# EAGLE board button (EAGLE 6.5.0)
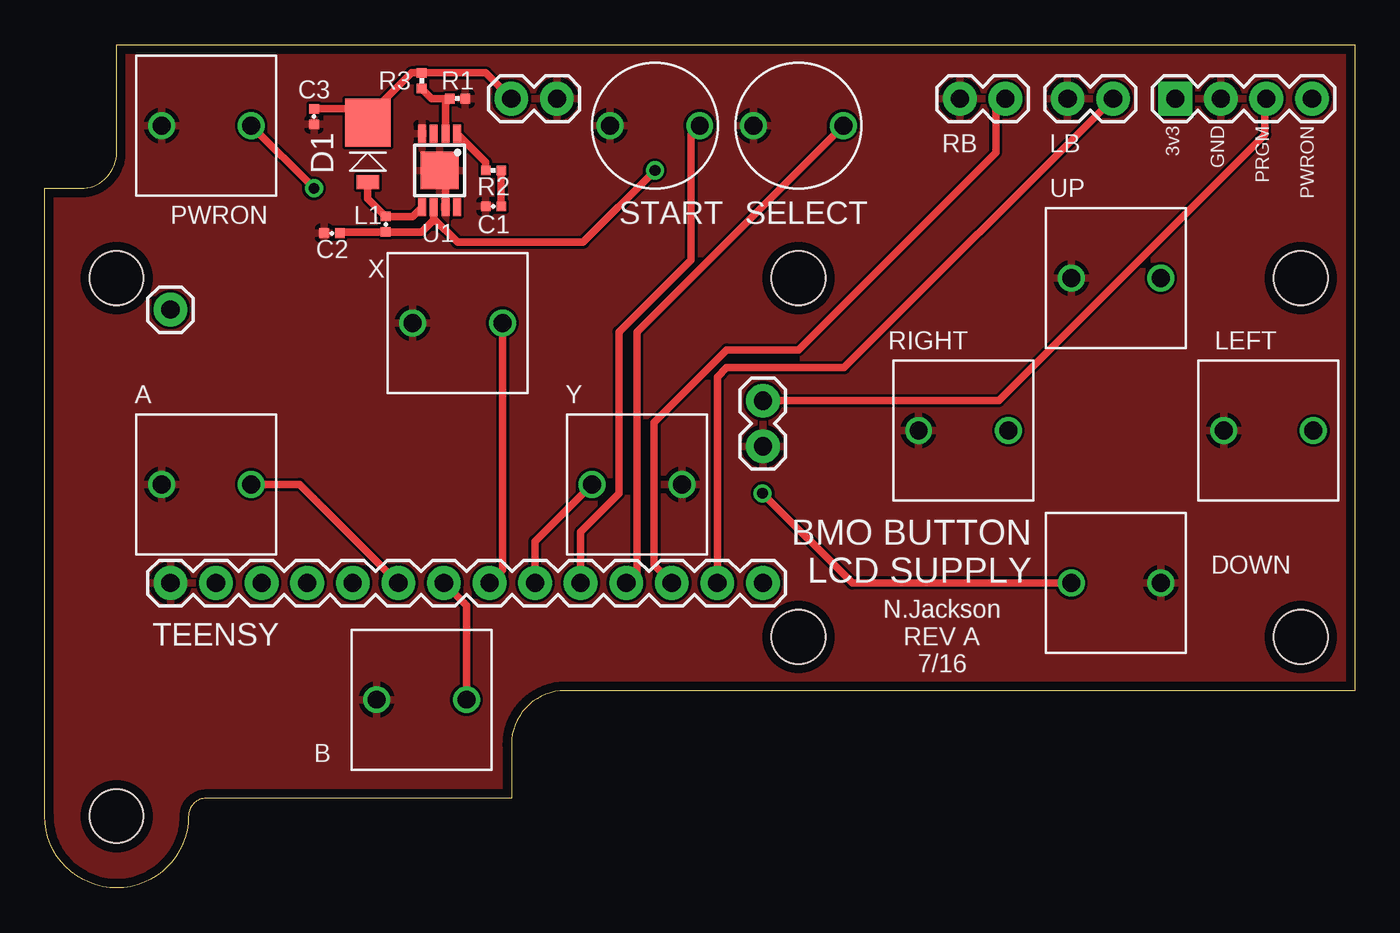
[diagram p0: board, top side]
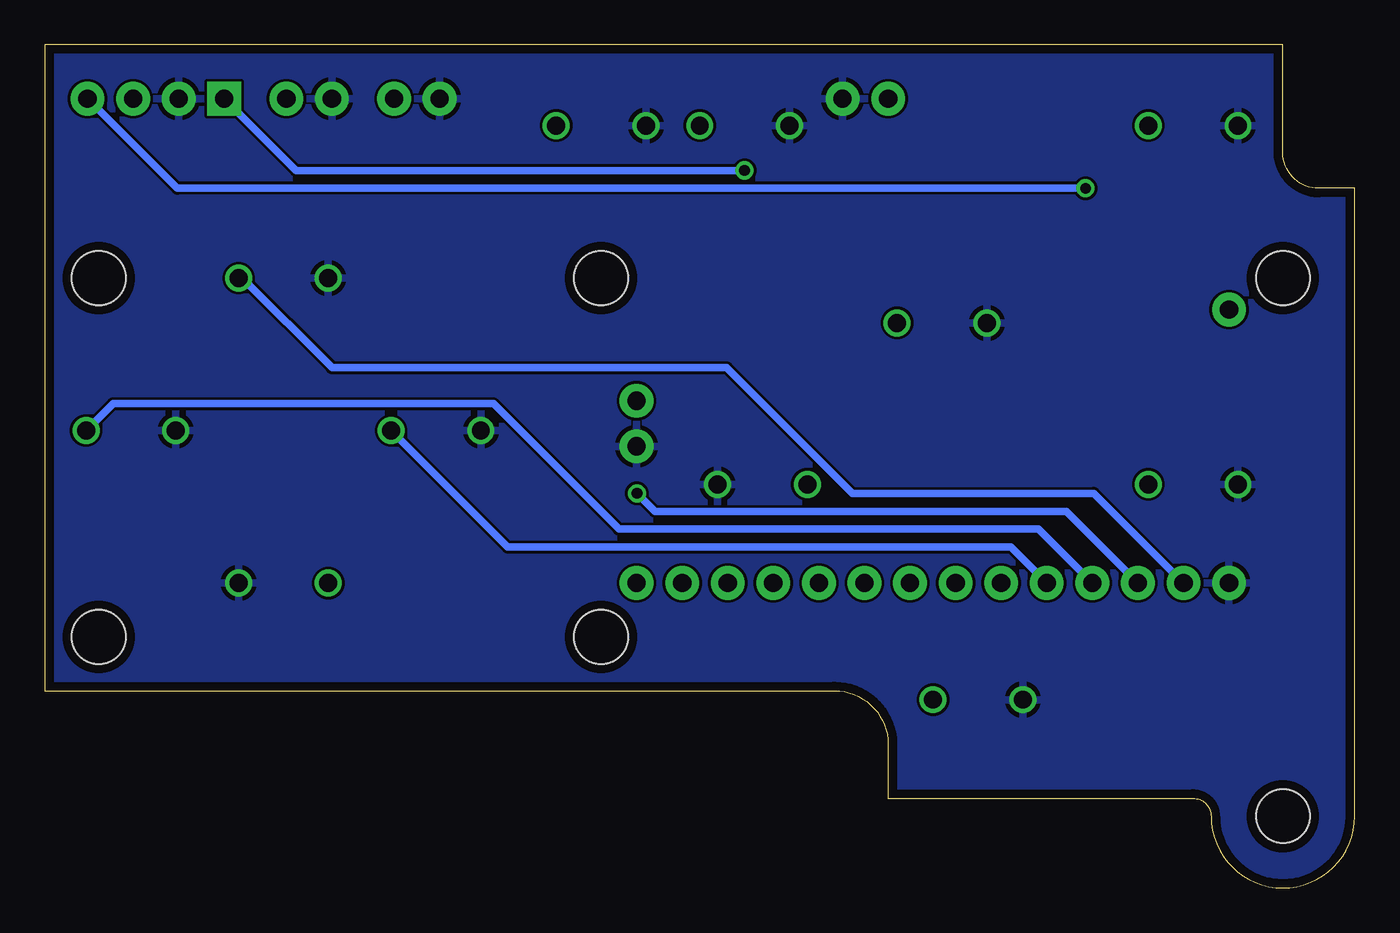
[diagram p1: board, bottom side, seen from below]

Size 73 x 47 mm. Coordinates in mm from the lower left corner, seen from the top.
Outline: 0,4 0,39 2,39 arc90 4,41 4,47 73,47 73,11 29,11 arc90 26,8 26,5 9,5 arc90 8,4 arc-180 0,4
Copper layers (1*16): Top 0.0178mm / dielectric 59mil / Bottom 0.0178mm
Design rules "sunstone-2lyr_v1.0.0.3": minimum track width 6mil, minimum drill 14mil, track to track 6mil, track to pad 6mil, pad to pad 6mil, via to via 6mil, smd to smd 6mil, copper to edge 20mil, drill to drill 16mil, minimum pad ring 8mil, minimum via ring 8mil, stop-mask expansion 3mil, vias tented up to drill 50mil, thermal gap 10mil
Holes 3 mm at 4,34 4,4 42,14 42,34 70,34 70,14

## Footprints (pad centres in the part's own frame; a part is rotated, then mirrored left to right if it is on the bottom)
SKPDAMD010 = drill 1: P$1 -2.5,0; P$2 2.5,0
0402_CAP = smd 0.536 x 0.546: 1 -0.433,0; 2 0.433,0
DO-216AA = smd 0.762 x 1.27: ANODE 1.653,0 | smd 2.67 x 2.54: CATHODE -1.653,0
1X02 = drill 1.016 pad 1.88: 1 0,0; 2 2.54,0
1X04 = drill 1.016 pad 1.88 square: 1 0,0 | drill 1.016 pad 1.88: 2 2.54,0; 3 5.08,0; 4 7.62,0
0402_RES = smd 0.536 x 0.546: 1 -0.433,0; 2 0.433,0
EVQ11D09K = drill 1: P$1 -2.5,0; P$2 2.5,0
TEENSY_LC = drill 1.016 pad 1.88: 1 0,0; 2 2.54,0; 3 5.08,0; 4 7.62,0; 5 10.16,0; 6 12.7,0; 7 15.24,0; 8 17.78,0; 9 20.32,0; 10 22.86,0; 11 25.4,0; 12 27.94,0; 13 30.48,0; 14 33.02,0; 17 33.02,7.62; 18 33.02,10.16; 22 0,15.24
MSOP8 = smd 0.45 x 1: 1 -0.975,-2.05; 2 -0.325,-2.05; 3 0.325,-2.05; 4 0.975,-2.05; 5 0.975,2.05; 6 0.325,2.05; 7 -0.325,2.05; 8 -0.975,2.05 | smd 2.1 x 2.1: GND 0,0

## Placement (x,y rotation side)
A  SKPDAMD010  [SKPDAMD010]  9,22.5 0 top
B  SKPDAMD010  [SKPDAMD010]  21,10.5 0 top
C1  2.2n  [0402_CAP]  25,38 180 top
C2  22u  [0402_CAP]  16,36.5 180 top
C3  22u  [0402_CAP]  15,43 270 top
D1  MBRM140T3G  [DO-216AA]  18,41 270 top
DOWN  SKPDAMD010  [SKPDAMD010]  59.7,17 180 top
JP1  [1X02]  26,44 0 top
JP2  [1X04]  63,44 0 top
L1  10u  [0402_CAP]  19,37 90 top
LB  [1X02]  57,44 0 top
LEFT  SKPDAMD010  [SKPDAMD010]  68.2,25.5 0 top
PWRON  SKPDAMD010  [SKPDAMD010]  9,42.5 0 top
R1  7.5k  [0402_RES]  23,44 180 top
R2  24k  [0402_RES]  25,40 180 top
R3  40.2k  [0402_RES]  21,45 90 top
RB  [1X02]  51,44 0 top
RIGHT  SKPDAMD010  [SKPDAMD010]  51.2,25.5 0 top
SELECT  EVQ11D09K  [EVQ11D09K]  42,42.5 0 top
START  EVQ11D09K  [EVQ11D09K]  34,42.5 0 top
TEENSY  TEENSY_LC  [TEENSY_LC]  7,17 0 top
U1  LM2622  [MSOP8]  22,40 180 top
UP  SKPDAMD010  [SKPDAMD010]  59.7,34 0 top
X  SKPDAMD010  [SKPDAMD010]  23,31.5 0 top
Y  SKPDAMD010  [SKPDAMD010]  33,22.5 180 top

## Library data of the parts
A B DOWN LEFT PWRON RIGHT UP X Y = switches; MOUSER: 688-SKPDAM
C1-C3 L1 R1-R3 = passives
D1 SELECT START TEENSY U1 = BMO
JP1 JP2 LB RB = SparkFun-Connectors

## Nets
3.3V: C2.1 JP2.1 L1.1 U1.6
GND: A.P$1 B.P$1 C1.2 C2.2 C3.2 DOWN.P$1 JP1.2 JP2.2 LB.1 LEFT.P$1 PWRON.P$1 R1.1 RB.1 RIGHT.P$1 SELECT.P$1 START.P$1 TEENSY.1 TEENSY.17 U1.4 U1.7 U1.GND UP.P$1 X.P$1 Y.P$1
N$1: A.P$2 TEENSY.6
N$2: JP2.4 PWRON.P$2
N$3: TEENSY.2 UP.P$2
N$4: DOWN.P$2 TEENSY.3
N$5: LEFT.P$2 TEENSY.4
N$6: RIGHT.P$2 TEENSY.5
N$7: C1.1 R2.1
N$8: B.P$2 TEENSY.7
N$9: TEENSY.8 X.P$2
N$10: TEENSY.9 Y.P$2
N$11: START.P$2 TEENSY.10
N$12: SELECT.P$2 TEENSY.11
N$13: RB.2 TEENSY.12
N$14: LB.2 TEENSY.13
N$15: R2.2 U1.1
N$16: D1.ANODE L1.2 U1.5
N$17: R1.2 R3.1 U1.2
PROGRAM: JP2.3 TEENSY.18
VCC8V: C3.1 D1.CATHODE JP1.1 R3.2

## Tracks (layer width: path | path; a pad name or v marks a point on that pad's centre or on a via)
3.3V  (via drill 0.6)
  Top 0.406: C2.1 16.5,36.57 L1.1 21,36.57 21.68,37.24 U1.6 21.68,37.33 23,36 30,36 v34,40
  Bottom 0.406: v34,40 59,40 JP2.1
GND
  Top 0.406: U1.7 22.32,39.67 U1.GND
  pour Bottom: 4,47 4,41 arc-90 2,39 0,39 0,0 73,0 73,47
  pour Top: 4,47 73,47 73,0 0,0 0,39 2,39 arc90 4,41
N$1
  Top 0.406: A.P$2 14.2,22.5 TEENSY.6
N$2  (via drill 0.6)
  Top 0.406: PWRON.P$2 v15,39
  Bottom 0.406: v15,39 65.62,39 JP2.4
N$3
  Bottom 0.406: UP.P$2 62,34 57,29 35,29 28,22 14.54,22 TEENSY.2
N$4  (via drill 0.6)
  Top 0.406: DOWN.P$2 45,17 v40,22
  Bottom 0.406: v40,22 39,21 16.08,21 TEENSY.3
N$5
  Bottom 0.406: LEFT.P$2 69.2,27 48,27 41,20 17.62,20 TEENSY.4
N$6
  Bottom 0.406: RIGHT.P$2 47.2,19 19.16,19 TEENSY.5
N$7
  Top 0.406: R2.1 C1.1
N$8
  Top 0.406: B.P$2 23.5,15.74 TEENSY.7
N$9
  Top 0.406: X.P$2 25.5,17.72 TEENSY.8
N$10
  Top 0.406: TEENSY.9 27.32,19.32 Y.P$2
N$11
  Top 0.406: TEENSY.10 29.86,19.86 32,22 32,31 36,35 36,42 START.P$2
N$12
  Top 0.406: TEENSY.11 33,17.6 33,31 SELECT.P$2
N$13
  Top 0.406: TEENSY.12 33.94,18 33.94,25.94 38,30 42,30 53,41 53,43.46 RB.2
N$14
  Top 0.406: TEENSY.13 37.48,28.48 38,29 44.54,29 LB.2
N$15
  Top 0.406: R2.2 24.57,40.46 U1.1
N$16
  Top 0.406: U1.5 20.51,37.43 L1.2 18,38.43 D1.ANODE
N$17
  Top 0.406: U1.2 22.32,43.76 R1.2 21.57,44 R3.1
PROGRAM
  Top 0.406: TEENSY.18 53.16,27.16 68,42 68,43.92 JP2.3
VCC8V
  Top 0.406: C3.1 17.22,43.43 D1.CATHODE 18,43 20.43,45.43 R3.2 24.57,45.43 JP1.1

## Text on the board
tNames: 3v3 | GND | PRGM | PWRON | BMO BUTTON / LCD SUPPLY | N.Jackson / REV A / 7/16
tValues: 8V